# EAGLE board cloud_sensor_panelize (EAGLE 6.4)
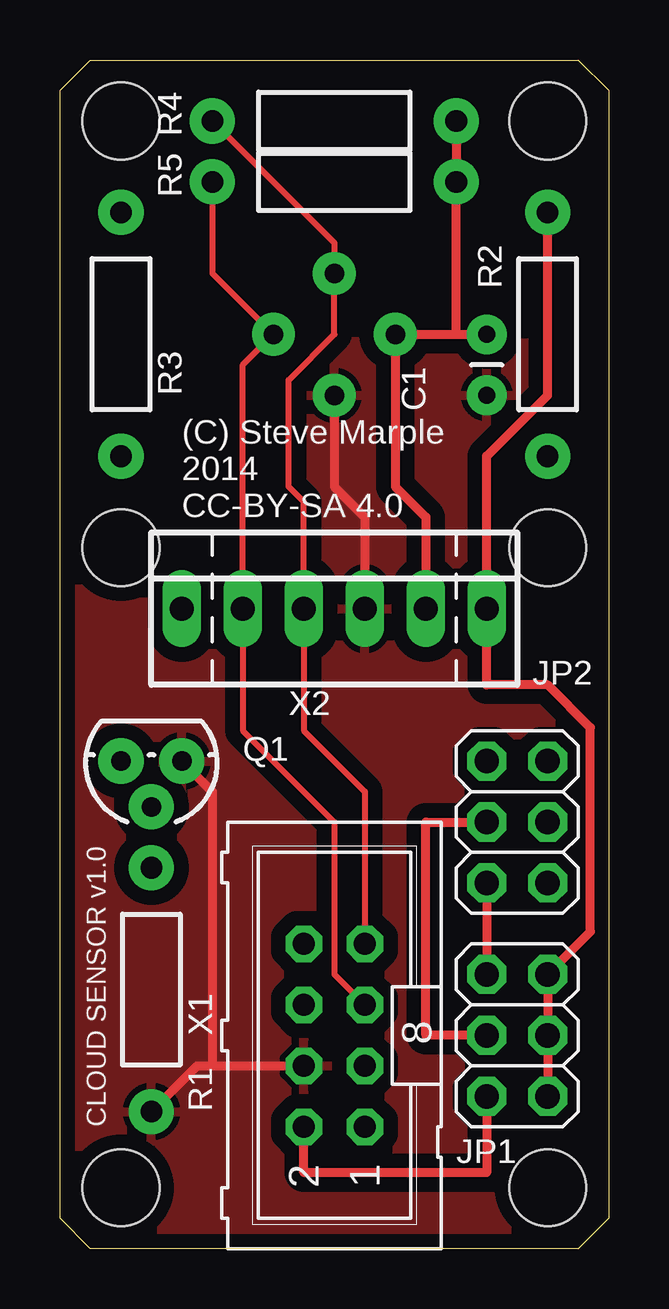
[diagram p0: board, top side]
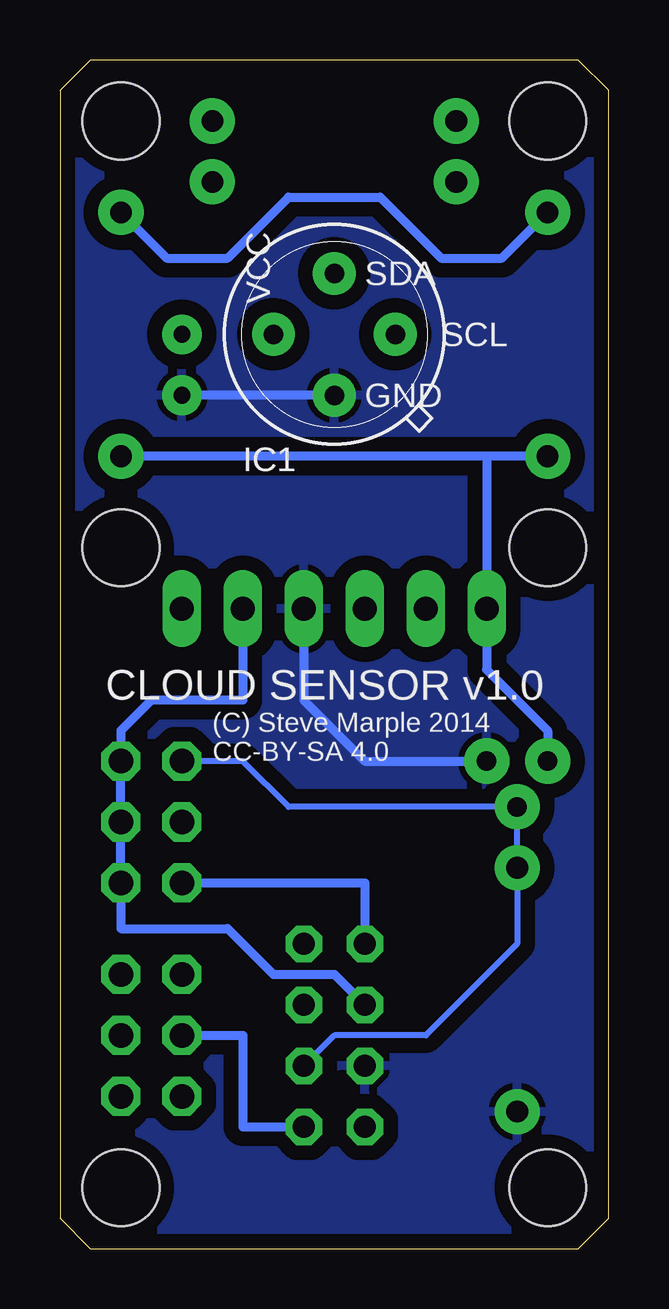
[diagram p1: board, bottom side, seen from below]

Size 22.86 x 49.53 mm. Coordinates in mm from the lower left corner, seen from the top.
Outline: 0,1.27 0,48.26 1.27,49.53 21.59,49.53 22.86,48.26 22.86,1.27 21.59,0 1.27,0 0,1.27
Copper layers (1*16): Top 0.035mm / dielectric 1.5mm / Bottom 0.035mm
Design rules "SparkFun_Iteadstudio_10mil": minimum track width 10mil, minimum drill 20mil, track to track 10mil, track to pad 10mil, pad to pad 10mil, via to via 10mil, smd to smd 10mil, copper to edge 0.5mm, drill to drill 8mil, minimum pad ring 12mil, minimum via ring 10mil, stop-mask expansion 4mil, vias tented up to drill 25mil, thermal gap 10mil
Net classes: 1 power: width 0.381 mm
Holes 3.2 mm at 2.54,2.54 20.32,2.54 20.32,46.99 2.54,46.99 2.54,29.21 20.32,29.21

## Footprints (pad centres in the part's own frame; a part is rotated, then mirrored left to right if it is on the bottom)
CAP-PTH-SMALL = drill 0.7 pad 1.651: 1 0,0; 2 2.54,0
TO39-4 = drill 0.813 pad 1.778: 1 0,-2.54; 2 2.54,0; 3 0,2.54; 4 -2.54,0
2X03 = drill 1.016 octagon: 1 -2.54,-1.27; 2 -2.54,1.27; 3 0,-1.27; 4 0,1.27; 5 2.54,-1.27; 6 2.54,1.27
TO-92 = drill 0.813 pad 1.88: 1 -1.27,0; 2 0,1.905; 3 1.27,0
RES-AXIAL-0.4 = drill 0.9 pad 1.88: P$1 -5.08,0; P$2 5.08,0
ML8 = drill 0.914 octagon: 1 -3.81,-1.27; 2 -3.81,1.27; 3 -1.27,-1.27; 4 -1.27,1.27; 5 1.27,-1.27; 6 1.27,1.27; 7 3.81,-1.27; 8 3.81,1.27
22-23-2061 = drill 1 long: 1 -6.35,0; 2 -3.81,0; 3 -1.27,0; 4 1.27,0; 5 3.81,0; 6 6.35,0

## Placement (x,y rotation side)
C1  100n  [CAP-PTH-SMALL]  17.78,38.1 270 top
IC1  MLX90614  [TO39-4]  11.43,38.1 90 bottom
JP1  HEAT VCC  [2X03]  19.05,8.89 270 top
JP2  VCC  [2X03]  19.05,17.78 90 top
Q1  2N7000  [TO-92]  3.81,20.32 180 top
R1  1M  [RES-AXIAL-0.4]  3.81,10.79 90 top
R2  100R  [RES-AXIAL-0.4]  20.32,38.1 90 top
R3  100R  [RES-AXIAL-0.4]  2.54,38.1 90 top
R4  10k  [RES-AXIAL-0.4]  11.43,46.99 0 top
R5  10k  [RES-AXIAL-0.4]  11.43,44.45 0 top
X1  SHIELD  [ML8]  11.43,8.89 90 top
X2  SENSOR  [22-23-2061]  11.43,26.67 0 top

## Library data of the parts
C1 = SparkFun
IC1 Q1 R1-R5 X1 = SteveMarple
JP1 JP2 = pinhead
X2 = con-molex; MF: MOLEX; MPN: 22-23-2061; OC_FARNELL: 1462922; OC_NEWARK: 27C1933

## Nets
+3V3 [power]: JP1.1 JP2.2 X1.8
+5V [power]: JP1.3 JP2.4 X1.1
CONTROL: JP2.6 Q1.2 R1.P$2 X1.3
GND [power]: C1.2 IC1.4 Q1.1 R1.P$1 X1.4 X2.4
HEATER_CONTROL [power]: Q1.3 R2.P$1 R3.P$1 X2.1
HEATER_VCC [power]: JP1.2 JP1.4 JP1.6 R2.P$2 R3.P$2 X2.6
SCL: IC1.1 R5.P$1 X1.5 X2.2
SDA: IC1.2 R4.P$1 X1.7 X2.3
VCC [power]: C1.1 IC1.3 JP2.1 JP2.3 JP2.5 R4.P$2 R5.P$2 X1.6 X2.5
VIN [power]: JP1.5 X1.2

## Tracks (layer width: path | path; a pad name or v marks a point on that pad's centre or on a via)
+3V3
  Top 0.381: JP2.2 JP1.1
  Bottom 0.381: X1.8 10.16,15.24 JP2.2
+5V
  Top 0.381: JP2.4 15.24,17.78 15.24,8.89 JP1.3
  Bottom 0.381: X1.1 15.24,5.08 15.24,8.89 JP1.3
CONTROL
  Bottom 0.254: JP2.6 15.24,20.32 13.34,18.41 Q1.2 R1.P$2 3.81,12.7 7.62,8.89 11.43,8.89 X1.3
GND
  Top 0.381: R1.P$1 5.71,7.62 X1.4 6.35,7.62 6.35,19.05 Q1.1 | X2.4 12.7,30.48 11.43,31.75 IC1.4
  Bottom 0.381: IC1.4 C1.2 | X2.4 12.7,22.86 10.16,20.32 Q1.1
  pour Bottom (isolate 0.61): -1.27,-1.27 -1.27,50.8 24.13,50.8 24.13,-1.27
  pour Top (isolate 0.61): -2.54,-2.54 -2.54,52.07 25.4,52.07 25.4,-2.54
HEATER_CONTROL
  Bottom 0.381: Q1.3 2.54,21.59 5.08,24.13 X2.1 5.08,33.02 | R3.P$1 5.08,33.02 | 5.08,33.02 R2.P$1
HEATER_VCC
  Top 0.381: JP1.6 JP1.4 JP1.2 22.1,13.21 22.1,21.72 20.32,23.5 17.78,23.5 X2.6 17.78,33.02 20.32,35.56 R2.P$2
  Bottom 0.381: R3.P$2 4.45,41.27 6.99,41.27 9.53,43.81 13.34,43.81 15.88,41.27 18.41,41.27 R2.P$2
SCL
  Top 0.254: R5.P$1 6.35,40.64 IC1.1 7.62,36.83 X2.2 7.62,21.59 11.43,17.78 11.43,11.43 X1.5
SDA
  Top 0.254: R4.P$1 11.43,41.91 IC1.2 11.43,38.1 9.53,36.2 9.53,31.75 10.16,31.11 X2.3 10.16,21.59 12.7,19.05 X1.7
VCC
  Top 0.381: R4.P$2 R5.P$2 16.51,38.1 | X2.5 15.24,30.48 13.97,31.75 IC1.3 16.51,38.1 | 16.51,38.1 C1.1
  Bottom 0.381: X1.6 11.43,11.43 13.97,11.43 15.88,13.34 20.32,13.34 JP2.1 JP2.3 JP2.5 20.32,21.59 19.05,22.86 15.24,22.86 X2.5
VIN
  Top 0.381: X1.2 10.16,3.17 17.78,3.17 JP1.5 17.78,6.41

## Text on the board
_tsilk: (C) Steve Marple / 2014 / CC-BY-SA 4.0 | CLOUD SENSOR v1.0
_bsilk: SDA | VCC | SCL | GND | CLOUD SENSOR v1.0 | (C) Steve Marple 2014 / CC-BY-SA 4.0
_tNames: R4 | R5 | R2 | R3 | C1 | JP2 | X2 | Q1 | X1 | R1 | JP1
_bNames: IC1